# Altium PCB 2226051_이강민_ATmega128_PCB_2.PcbDoc
Units mil, origin at the board's own origin, x right, y up, seen from the top; angles counter-clockwise.
Board outline 1811.02 x 1811.02 mil, 2 copper layers (Top Layer, Bottom Layer); 31 components, 75 nets, 206 pads, 25 vias.
Unrouted connection lines stored in the file: 5.
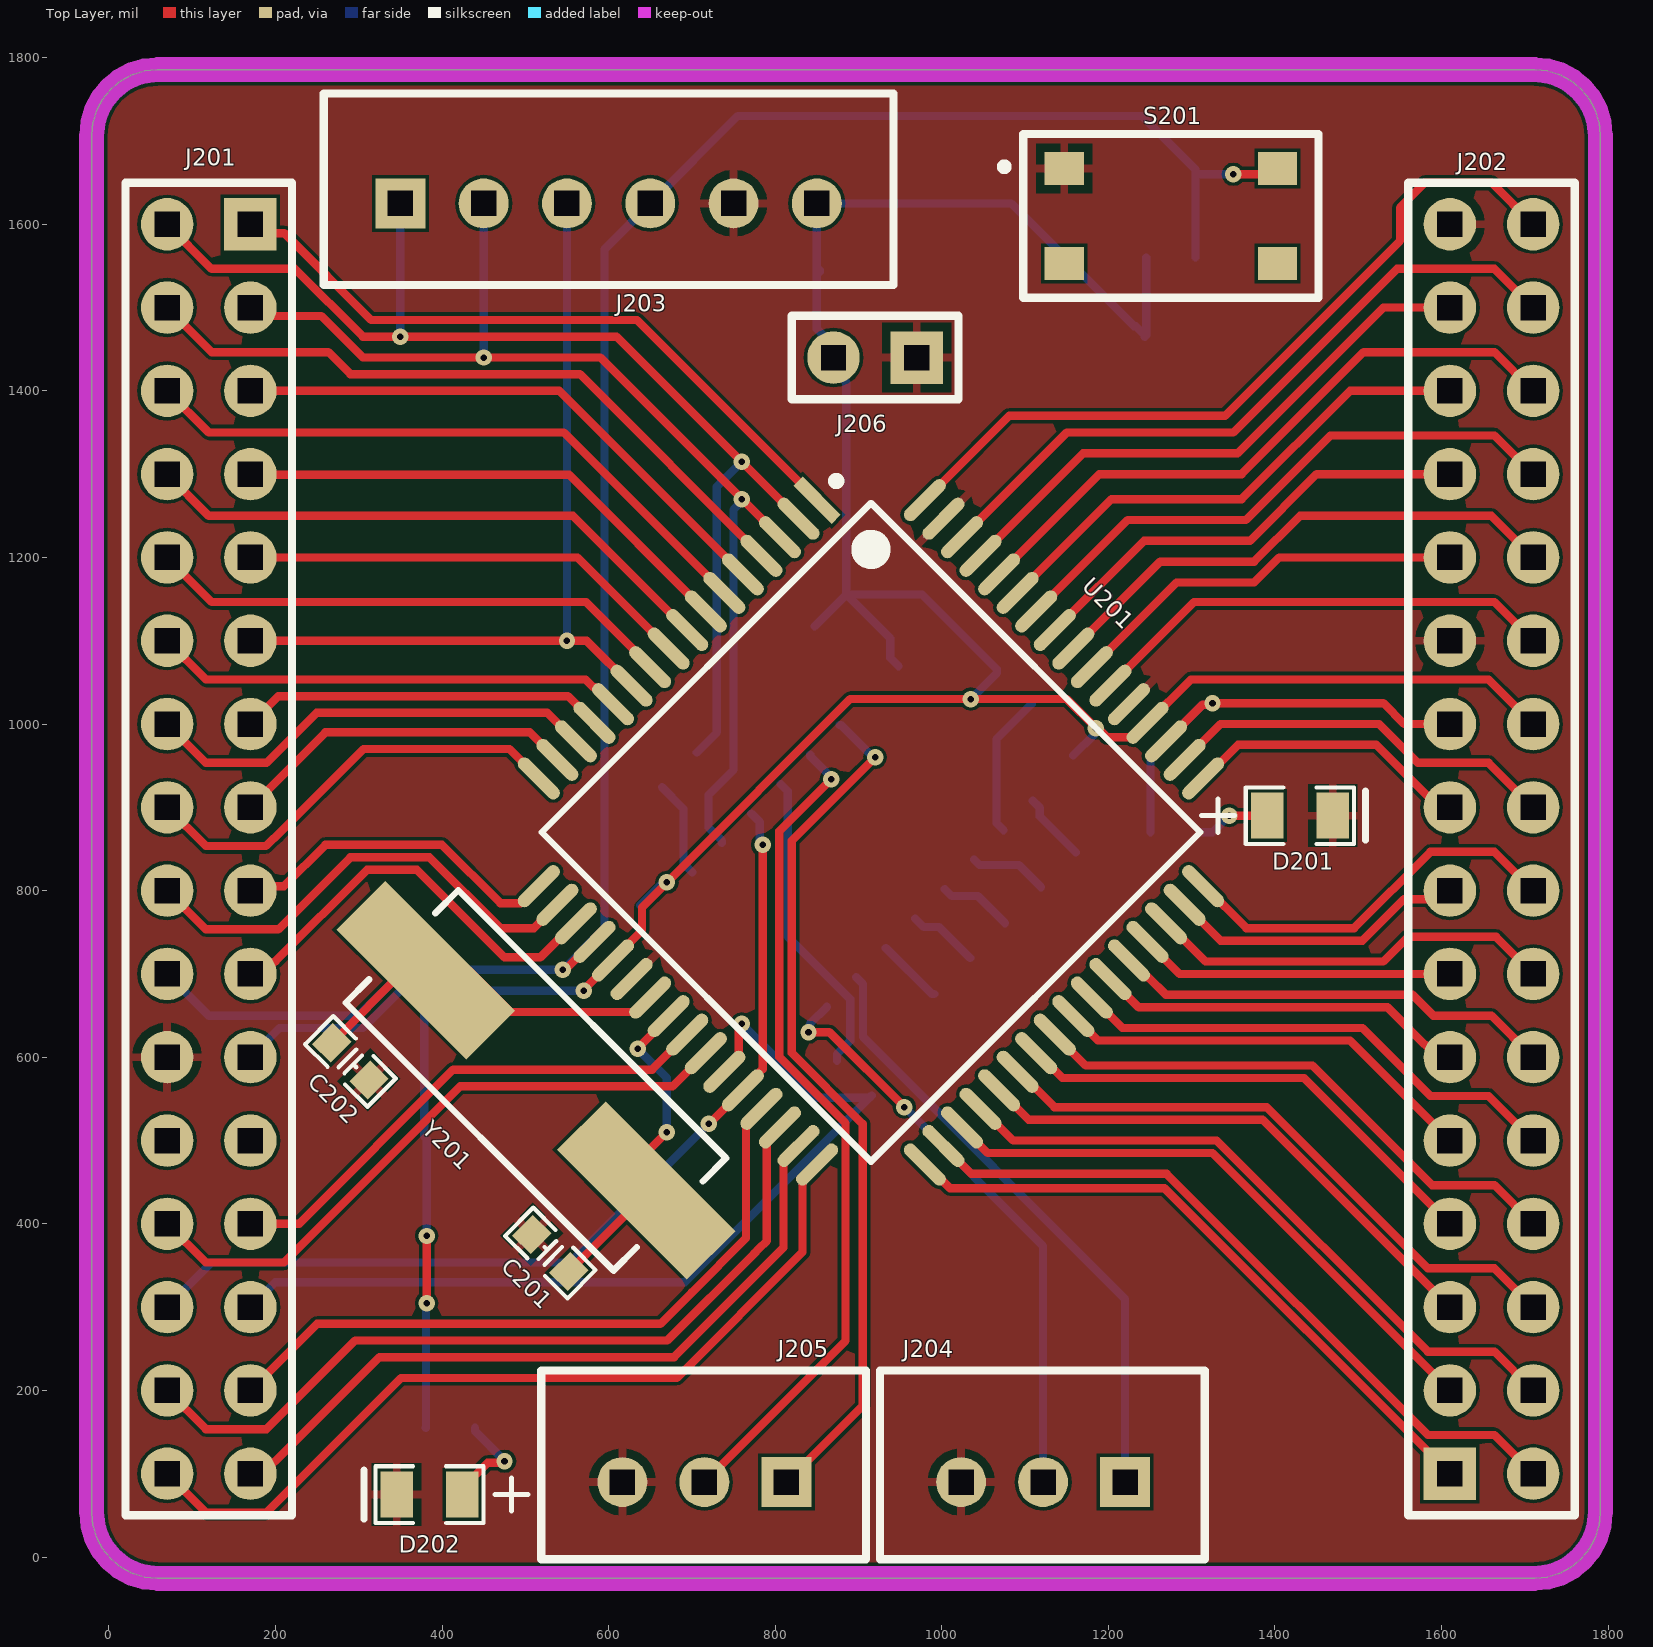
[diagram p0: Top Layer view]
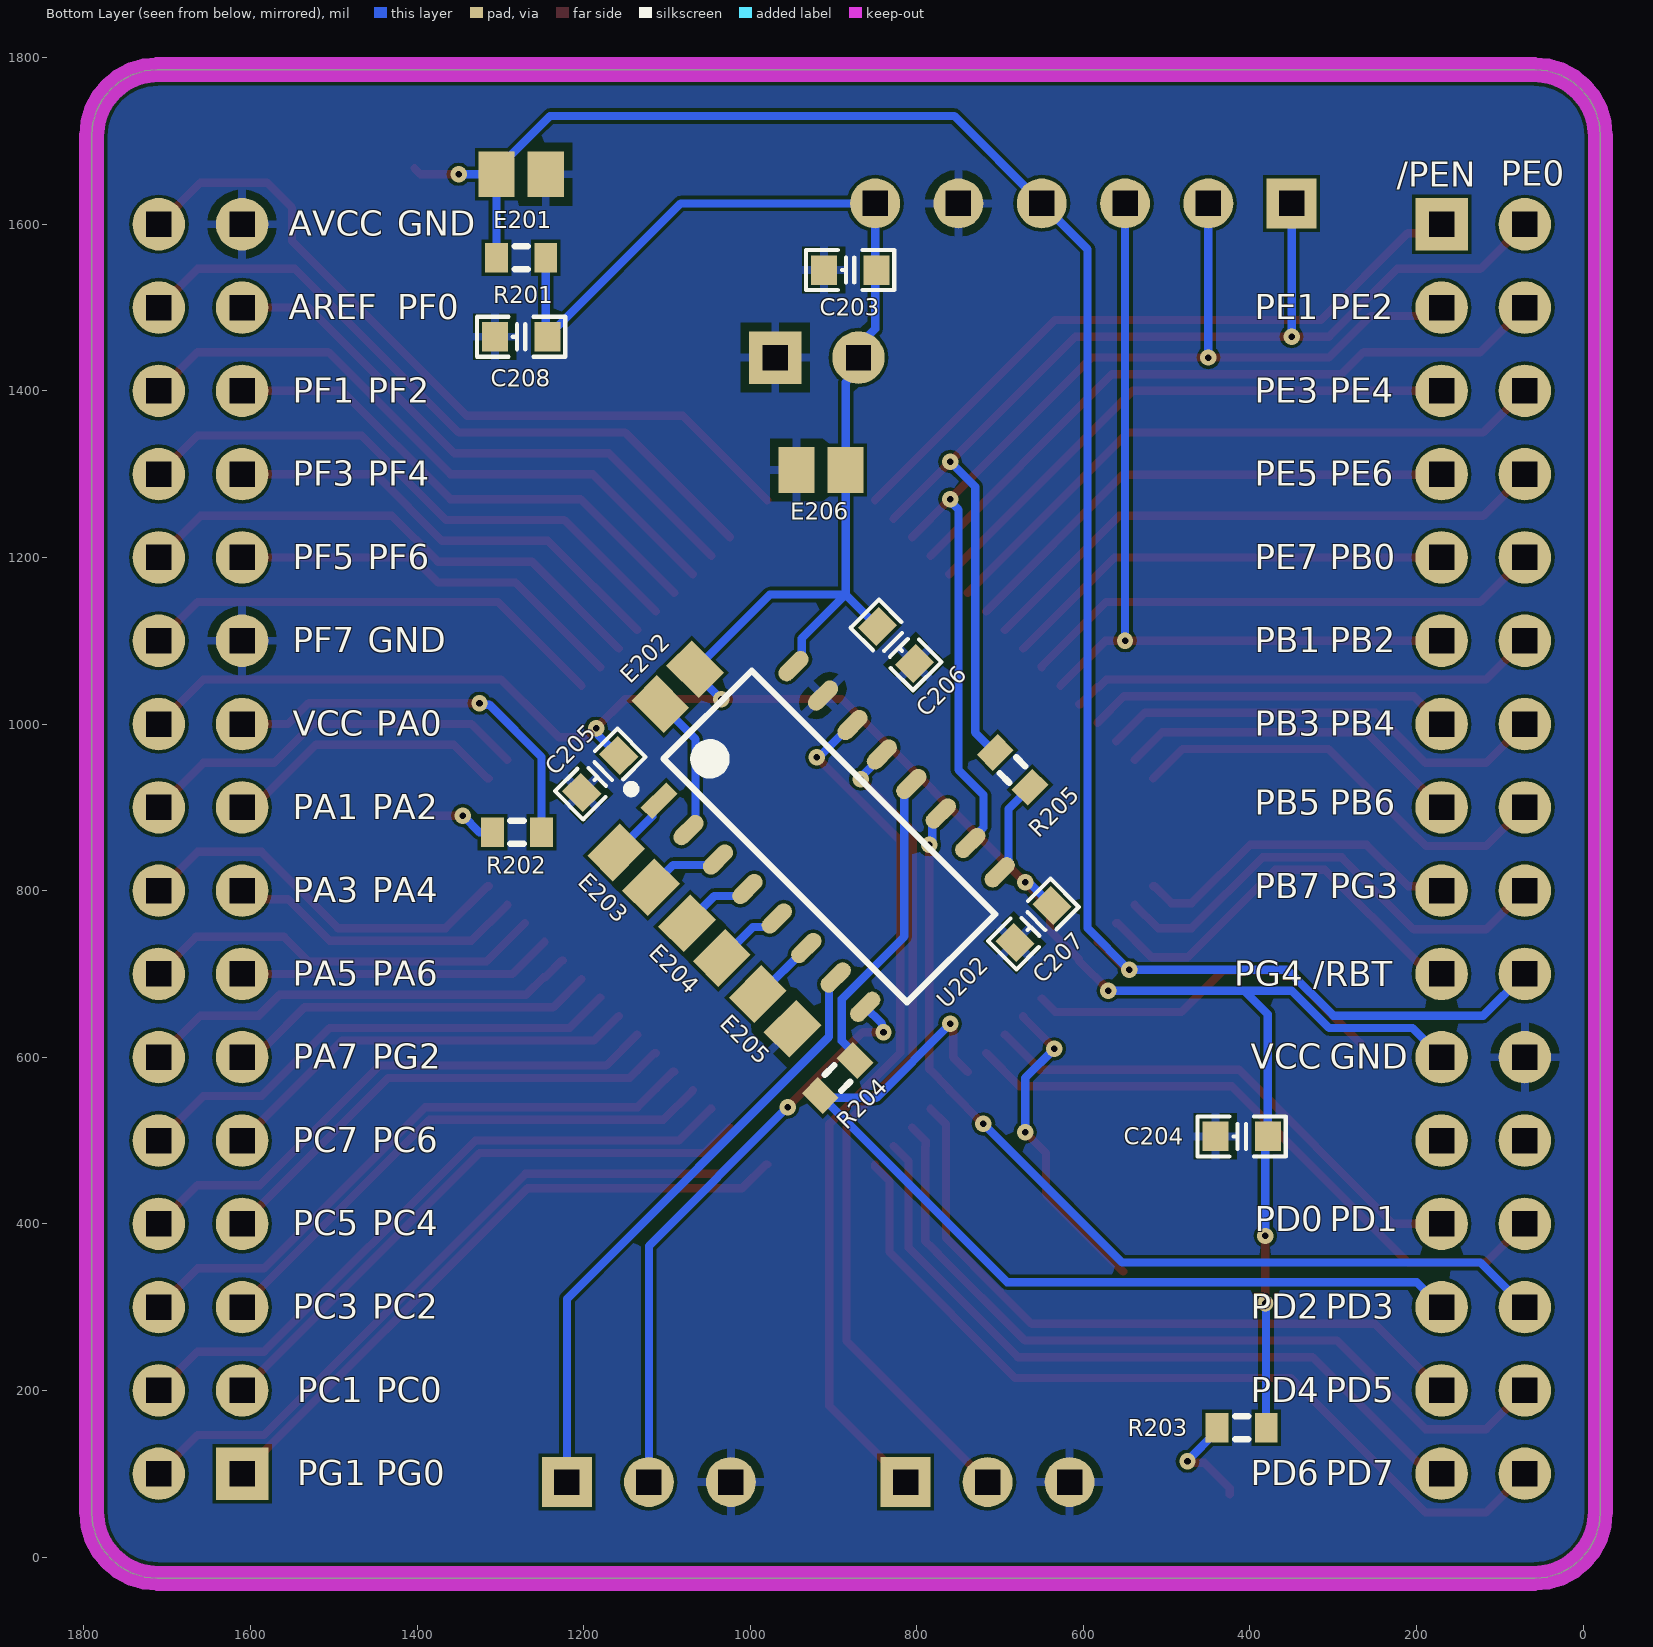
[diagram p1: Bottom Layer view, seen from below]
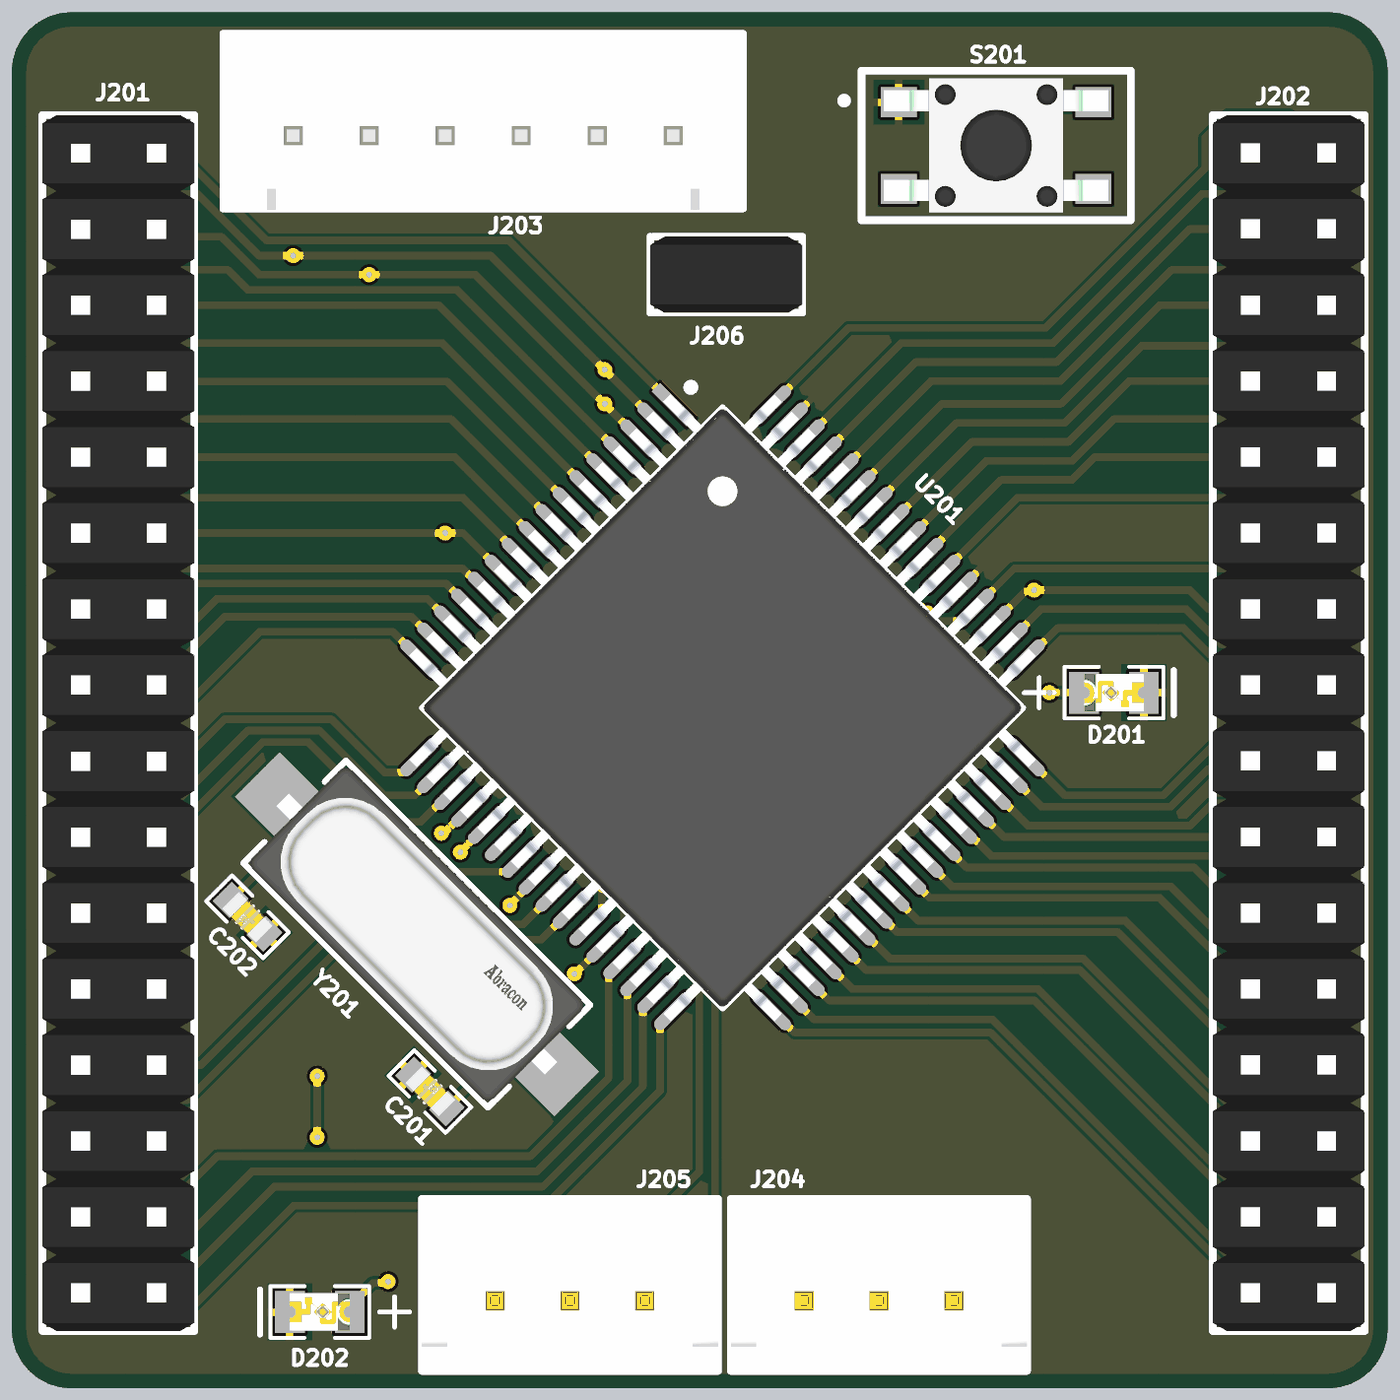
[diagram p2: 3D render of the assembled board from above, using the file's embedded part models]

## Layer stack, top to bottom
Top Solder: solder mask 0.4, Solder Resist, Dk 3.5
Top Layer: signal copper 1.4
Dielectric 1: dielectric 12.6, FR-4, Dk 4.8
Bottom Layer: signal copper 1.4
Bottom Solder: solder mask 0.4, Solder Resist, Dk 3.5

## Board outline
-20.51,53.23 -19,37.87 -14.52,23.1 -7.24,9.48 2.55,-2.45 14.48,-12.24 28.1,-19.52 42.87,-24 58.23,-25.51 1711.77,-25.51 1727.13,-24 1741.9,-19.52 1755.52,-12.24 1767.45,-2.45 1777.24,9.48 1784.52,23.1 1789,37.87 1790.51,53.23 1790.51,1706.77 1789,1722.13 1784.52,1736.9 1777.24,1750.52 1767.45,1762.45 1755.52,1772.24 1741.9,1779.52 1727.13,1784 1711.77,1785.51 58.23,1785.51 42.87,1784 28.1,1779.52 14.48,1772.24 2.55,1762.45 -7.24,1750.52 -14.52,1736.9 -19,1722.13 -20.51,1706.77

## Design rules (kind name [scope] priority, off if disabled: settings)
Clearance [All] p1: gap=3.9 ignorepadtopadclearanceinfootprint=FALSE
PolygonConnect [All] p1: connectstyle=Relief reliefconductorwidth=10 reliefentries=4 polygonreliefangle="90 Angle" airgapwidth=10
RoutingVias [All] p1: holewidth=7.87 width=19.68 viastyle="Through Hole" minholewidth=7.87 minwidth=19.68 maxholewidth=7.87 maxwidth=19.68
SilkToSilkClearance [All] p1: silktosilkclearance=3
SolderMaskExpansion [All] p1: expansion=4 istentingtop=FALSE
SupplyNets "Schematic Supply Nets_1" [InNet('VCC_Module')] p1: voltage=0.000
SupplyNets "Schematic Supply Nets" [InNet('GND')] p2: voltage=0.000
Width [All] p1: maxlimit=10 minlimit=10 preferedwidth=10
29 further rules are at their usual default settings.

## Components (designator, comment, footprint, x,y, rotation, side; value= is the part's Value field where it differs from the comment)
C201 "20pF" 0603C1608 530,365 r315 top
C202 "20pF" 0603C1608 290,595 r135 top
C203 "0.1uF" 0603C1608 880,1545 r180 bottom
C204 "0.1uF" 0603C1608 410,505 r180 bottom
C205 "0.1uF" 0603C1608 1180,940 r135 bottom
C206 "0.1uF" 0603C1608 825,1095 r45 bottom
C207 "0.1uF" 0603C1608 660,760 r135 bottom
C208 "0.1uF" 0603C1608 1275,1465 r180 bottom
D201 "LED_green" LED-2012 1430,890 r0 top
D202 "LED_red" LED-2012 385,75 r180 top
E201 "Cap Pol3" C0805 1275,1660 r180 bottom value=10uF
E202 "Cap Pol3" C0805 1087.07,1044.87 r135 bottom value=1uF
E203 "Cap Pol3" C0805 1140,825 r225 bottom value=1uF
E204 "Cap Pol3" C0805 1055,740 r225 bottom value=1uF
E205 "Cap Pol3" C0805 970,655 r45 bottom value=1uF
E206 "Cap Pol3" C0805 915,1305 r0 bottom value=10uF
J201 "CON32A" CON32A 120,850 r0 top
J202 "CON32A" CON32A 1660,850 r180 top
J203 "Pin Header 6P 2.54" ISP_connector 600,1625 r0 top
J204 "CON 3" RS-232_connector 1121.57,90 r180 top
J205 "CON 3" RS-232_connector 715,90 r180 top
J206 "Battery" battery_2pin 920,1440 r180 top
R201 "Res3" J1-0603 1275,1560 r180 bottom value=4.7K
R202 "Res3" J1-0603 1280,870 r180 bottom value=680
R203 "Res3" J1-0603 410,155 r180 bottom value=680
R204 "Res3" J1-0603 895,575 r135 bottom value=1K
R205 "Res3" J1-0603 685,945 r225 bottom value=1K
S201 "TACT_switch" IT-1109S 1275,1610 r0 top
U201 "ATmega128" ATmega128_1414 915,870 r315 top locked
U202 "MAX232A" MAX232A 905,865 r135 bottom
Y201 "XTAL 16MHz" X-TAL_SMD 512.77,572.23 r315 top

## Footprints (in the part's own frame and the unit in brackets; to place one, negate y for a bottom-side part, rotate by r counter-clockwise, add the part's x,y. Pads: shape width x height; smd on the part's side, far side on the other; paste and mask are expansions set on the pad)
0603C1608 [mm]
  rect 0.8x0.9 smd: 1(-0.8,0) 2(0.8,0)
  silkscreen extent -1.35,-0.61 1.35,0.61, body extent -0.8,-0.39 0.8,0.41, height 0.29
ATmega128_1414 [mm] "TQFP, 64-Leads, Body 14.00x14.00mm, Pitch 0.80mm, IPC Medium Density"
  rect 1.65x0.4 smd: 1(-8.325,6)
  oval 1.65x0.4 smd: 2(-8.325,5.2) 3(-8.325,4.4) 4(-8.325,3.6) 5(-8.325,2.8) 6(-8.325,2) 7(-8.325,1.2) 8(-8.325,0.4) 9(-8.325,-0.4) 10(-8.325,-1.2) 11(-8.325,-2) 12(-8.325,-2.8) 13(-8.325,-3.6) 14(-8.325,-4.4) 15(-8.325,-5.2) 16(-8.325,-6) 33(8.325,-6) 34(8.325,-5.2) 35(8.325,-4.4) 36(8.325,-3.6) 37(8.325,-2.8) 38(8.325,-2) 39(8.325,-1.2) 40(8.325,-0.4) 41(8.325,0.4) 42(8.325,1.2) 43(8.325,2) 44(8.325,2.8) 45(8.325,3.6) 46(8.325,4.4) 47(8.325,5.2) 48(8.325,6)
  oval 0.4x1.65 smd: 17(-6,-8.325) 18(-5.2,-8.325) 19(-4.4,-8.325) 20(-3.6,-8.325) 21(-2.8,-8.325) 22(-2,-8.325) 23(-1.2,-8.325) 24(-0.4,-8.325) 25(0.4,-8.325) 26(1.2,-8.325) 27(2,-8.325) 28(2.8,-8.325) 29(3.6,-8.325) 30(4.4,-8.325) 31(5.2,-8.325) 32(6,-8.325) 49(6,8.325) 50(5.2,8.325) 51(4.4,8.325) 52(3.6,8.325) 53(2.8,8.325) 54(2,8.325) 55(1.2,8.325) 56(0.4,8.325) 57(-0.4,8.325) 58(-1.2,8.325) 59(-2,8.325) 60(-2.8,8.325) 61(-3.6,8.325) 62(-4.4,8.325) 63(-5.2,8.325) 64(-6,8.325)
  silkscreen extent -8.45,-7.1 7.1,7.1, body extent -8.64,-8.64 8.64,8.64, height 2.85
battery_2pin [mm]
  rect 1.6x1.6 hole 0.762 square: 1(-1.27,0)
  round 1.6 hole 0.762 square: 2(1.27,0)
  silkscreen extent -2.54,-1.27 2.54,1.27, body extent -2.54,-1.27 2.54,1.27, height 8.4
C0805 [mm] "Chip Capacitor, Body 2.0x1.3mm, IPC High Density"
  rect 1.1x1.4 smd: 1(-0.75,0) 2(0.75,0)
  body extent -1.1,-0.72 1.1,0.72, height 1.4
CON32A [mm]
  rect 1.6x1.6 hole 0.762 square: 1(1.27,19.05)
  round 1.6 hole 0.762 square: 2(-1.27,19.05) 3(1.27,16.51) 4(-1.27,16.51) 5(1.27,13.97) 6(-1.27,13.97) 7(1.27,11.43) 8(-1.27,11.43) 9(1.27,8.89) 10(-1.27,8.89) 11(1.27,6.35) 12(-1.27,6.35) 13(1.27,3.81) 14(-1.27,3.81) 15(1.27,1.27) 16(-1.27,1.27) 17(1.27,-1.27) 18(-1.27,-1.27) 19(1.27,-3.81) 20(-1.27,-3.81) 21(1.27,-6.35) 22(-1.27,-6.35) 23(1.27,-8.89) 24(-1.27,-8.89) 25(1.27,-11.43) 26(-1.27,-11.43) 27(1.27,-13.97) 28(-1.27,-13.97) 29(1.27,-16.51) 30(-1.27,-16.51) 31(1.27,-19.05) 32(-1.27,-19.05)
  silkscreen extent -2.54,-20.32 2.54,20.32, body extent -2.54,-20.32 2.54,20.32, height 8.4
ISP_connector [mil]
  rect 60x60 hole 30 square: 1(-250,0)
  round 60 hole 30 square: 2(-150,0) 3(-50,0) 4(50,0) 5(150,0) 6(250,0)
  silkscreen extent -342,-98 342,132, body extent -342,-100 342,130, height 292
IT-1109S [mm]
  rect 1.2x1 smd: 1(-3.25,1.45) 2(3.25,1.45) 3(-3.25,-1.45) 4(3.25,-1.45)
  silkscreen extent -5.18,-2.5 4.5,2.5, body extent -3.75,-2.25 3.75,2.25, height 3.8
J1-0603 [mm] "Chip Resistor, Body 1.6x0.8mm, IPC High Density"
  rect 0.7x0.9 smd: 1(-0.75,0) 2(0.75,0)
  silkscreen extent -0.2,-0.35 0.2,0.35, body extent -0.85,-0.48 0.85,0.48, height 0.9
LED-2012 [mm]
  rect 1x1.4 smd: 1(-1,0) 2(1,0)
  silkscreen extent -3.01,-0.86 2,0.86, body extent -1,-0.63 1,0.62, height 0.64
MAX232A [mm] "SOIC, 16-Leads, Body 10.30x4.50mm, Pitch 1.27mm, IPC Medium Density"
  rect 1.1x0.5 smd: 1(-2.9,4.44)
  oval 1.1x0.5 smd: 2(-2.9,3.175) 3(-2.9,1.905) 4(-2.9,0.635) 5(-2.9,-0.635) 6(-2.9,-1.905) 7(-2.9,-3.175) 8(-2.9,-4.445) 9(2.9,-4.445) 10(2.9,-3.175) 11(2.9,-1.905) 12(2.9,-0.635) 13(2.9,0.635) 14(2.9,1.905) 15(2.9,3.175) 16(2.9,4.445)
  silkscreen extent -3.37,-5.25 1.9,5.42, body extent -3,-5.1 3,5.1, height 1.7
RS-232_connector [mil]
  rect 60x60 hole 30 square: 1(-98.43,0)
  round 60 hole 30 square: 2(0,0) 3(98.43,0)
  silkscreen extent -194,-134 196,93, body extent -194,-134 196,93, height 276
X-TAL_SMD [mm]
  rect 5.6x2.1 smd paste+0 mask+0: 1(-4.75,0) 2(4.75,0)
  silkscreen extent -5.78,-2.43 5.78,2.43, body extent -6.35,-2.35 6.35,2.35, height 4.3

## Part data
C201 C202 C203 C204 C205 C206 C207 C208: library part CAP-Chip, "SMDCapacitor"
D201 D202: library part LED
E201 E202 E203 E204 E205 E206: "Polarized Capacitor (Surface Mount)", LatestRevisionDate=29-May-2009, LatestRevisionNote="IPC-7351 Footprint Added.", PackageDescription="Chip Capacitor", PackageReference=C0805, Published=8-Jun-2000, Publisher="Altium Limited"
J203: library part "Header 6", "Header, 6-Pin", LatestRevisionDate=17-Jul-2002, LatestRevisionNote="Re-released for DXP Platform.", Publisher="Altium Limited"
J204 J205: library part "Header 3", "Header, 3-Pin", LatestRevisionDate=17-Jul-2002, LatestRevisionNote="Re-released for DXP Platform.", Publisher="Altium Limited"
J206: library part "Header 2", "Header, 2-Pin", LatestRevisionDate=17-Jul-2002, LatestRevisionNote="Re-released for DXP Platform.", Publisher="Altium Limited"
R201 R202 R203 R204 R205: "Resistor", LatestRevisionDate=29-May-2009, LatestRevisionNote="IPC-7351 Footprint Added.", PackageDescription="Chip Resistor", PackageReference=J1-0603, Published=8-Jun-2000, Publisher="Altium Limited"
Y201: library part CRYSTAL, "Crystal"

## Via types
v1: diameter 19.68, hole 7.87, Top Layer to Bottom Layer, 25 vias

## Nets (pads, with @x,y where several pads share a name; then routed paths per layer and width w, separated by ;. In a path a pad name is that pad's centre, name@x,y a point inside that pad or via, vN(x,y) a via of type N, cw(c..) or ccw(c..) an arc to the next point about the centre after c; other vN are vias at no path point)
GND: C201.1 C202.1 C203.1 C204.1 C205.1 C206.1 C207.1 C208.1 D201.2 D202.2 E201.2 E205.1 E206.2 J201.22 J202.21 J202.31 J203.5 J204.3 J205.3 J206.1 S201.1 U201.22 U201.53 U201.63 U202.15
Module_MISO: J201.3 J203.2 U201.3 U202.10 | length 1370.8
  Top Layer w10: J201.3 180.14,1489.86 255.14,1489.86 305,1440 v1(450,1440) 590,1440 v1(760,1270) U201.3@805.73,1224.25
  Bottom Layer w10: v1(450,1440) J203.2 ; U202.10 735.88,859.97 720,875.84 720,915 750,945 750,1257.38 760,1267.38 v1(760,1270)
Module_MOSI: J201.2 J203.1 R205.1 U201.2 | length 1436
  Top Layer w10: J201.2 123.5,1546.5 223.5,1546.5 305,1465 v1(350,1465) 609.52,1465 U201.2
  Bottom Layer w10: v1(350,1465) J203.1 ; R205.1 730,990 730,1285 v1(760,1315)
Module_PA0: J202.19 R202.2 U201.51 | length 561.8
  Top Layer w10: U201.51 1313.13,1023.15 1323.15,1023.15 v1(1325,1025) 1530,1025 1555,1000 J202.19
  Bottom Layer w10: R202.2 1250.47,960.47 1313.15,1023.15 1323.15,1023.15 v1(1325,1025)
Module_pin_1: J201.1 U201.1 | length 817.5
  Top Layer w10: J201.1 180.64,1589.36 210.64,1589.36 315,1485 634.07,1485 U201.1
Module_pin_4: J201.4 U201.4 | length 836.9
  Top Layer w10: J201.4 123.5,1446.5 263.5,1446.5 290,1420 565.44,1420 U201.4
Module_pin_5: J201.5 U201.5 | length 682.4
  Top Layer w10: J201.5 540.9,1400 U201.5
Module_pin_6: J201.6 U201.6 | length 769.4
  Top Layer w10: J201.6 120,1350 546.36,1350 U201.6
Module_pin_7: J201.7 U201.7 | length 614.9
  Top Layer w10: J201.7 170.68,1299.32 552.49,1299.32 U201.7
Module_pin_8: J201.8 U201.8 | length 701.9
  Top Layer w10: J201.8 120,1250 557.27,1250 U201.8
Module_pin_9: J201.9 U201.9 | length 547.4
  Top Layer w10: J201.9 562.73,1200 U201.9
Module_pin_10: J201.10 U201.10 | length 635.1
  Top Layer w10: J201.10 123.5,1146.5 572.99,1146.5 649.84,1069.65 U201.10
Module_pin_11: J201.11 J203.3 U201.11 | length 1004.9
  Top Layer w10: J201.11 v1(550,1100) 573.64,1100 U201.11
  Bottom Layer w10: v1(550,1100) J203.3
Module_pin_12: J201.12 U201.12 | length 566.9
  Top Layer w10: J201.12 116.5,1053.5 572.45,1053.5 581.87,1044.08 583.46,1044.08 603.74,1023.81 U201.12
Module_pin_13: J201.13 U201.13 | length 440.1
  Top Layer w10: J201.13 203.5,1033.5 551.06,1033.5 U201.13
Module_pin_14: J201.14 U201.14 | length 549
  Top Layer w10: J201.14 116.5,953.5 189.26,953.5 249.26,1013.5 526.51,1013.5 U201.14
Module_pin_15: J201.15 U201.15 | length 419.4
  Top Layer w10: J201.15 260,990 505.48,990 U201.15
Module_pin_16: J201.16 U201.16 | length 528.3
  Top Layer w10: J201.16 116.5,853.5 188.5,853.5 197.53,862.53 198.29,862.53 202.88,867.12 203.09,867.34 305.75,970 480.93,970 U201.16
Module_pin_17: J201.17 U201.17 | length 406.4
  Top Layer w10: J201.17 175.38,805.38 210.38,805.38 260,855 400,855 470,785 494.38,785 514.65,805.27 U201.17
Module_pin_18: J201.18 U201.18 | length 570.4
  Top Layer w10: J201.18 116.5,753.5 203.5,753.5 290,840 385,840 470,755 510.48,755 U201.18
Module_pin_19: J201.19 U201.19 | length 502.9
  Top Layer w10: J201.19 184.34,700 199.72,715.38 200.38,715.38 310,825 370,825 475,720 517.96,720 558.7,760.73 U201.19
Module_pin_20: E201.1 J201.20 J203.4 R201.1 S201.2 U201.20 | length 2465.7
  Top Layer w10: v1(545,705) 546.85,706.85 549.86,706.85 581.47,738.46 U201.20 ; v1(1350,1660) 1395.87,1660 S201.2
  Bottom Layer w10: J201.20 120,650 300,650 355,705 v1(545,705) 595,755 595,1570 J203.4 755,1730 1240.43,1730 1304.53,1665.91 E201.1 ; R201.1 E201.1 ; v1(1350,1660) E201.1
Module_pin_25: J201.25 U201.25 | length 618.4
  Top Layer w10: J201.25 228.43,400 413.43,585 652.27,585 U201.25
Module_pin_26: J201.26 U201.26 | length 770
  Top Layer w10: J201.26 116.5,353.5 210.22,353.5 421.72,565 676.81,565 U201.26
Module_pin_27: J201.27 R204.1 U201.27 | length 1111.1
  Top Layer w10: U201.27 756.32,599.96 756.32,633.7 760,637.38 v1(760,640)
  Bottom Layer w10: J201.27 200,330 691.76,330 R204.1 913.1,551.34 848.66,551.34 v1(760,640)
Module_pin_28: J201.28 U201.28 U202.11 | length 1146.8
  Top Layer w10: v1(720,520) 720.45,520 U201.28@760.97,560.52 ; U201.28 761.19,561.85 785,585.66 v1(785,855)
  Bottom Layer w10: J201.28 123.5,353.5 553.5,353.5 v1(720,520) ; U202.11 781.44,882.5 781.44,861.18 785,857.62 v1(785,855)
Module_pin_29: J201.29 U201.29 | length 833.5
  Top Layer w10: J201.29 250,280 662.11,280 699.93,317.82 765,382.89 765,519.56 U201.29
Module_pin_30: J201.30 U201.30 | length 976
  Top Layer w10: J201.30 116.5,153.5 189.26,153.5 280,244.24 295.75,260 670.39,260 775,364.61 780,369.61 790,379.61 790,492.62 789.43,493.19 789.43,499.45 U201.30
Module_pin_31: J201.31 U201.31 | length 882
  Top Layer w10: J201.31 184.34,100 199.72,115.38 200.38,115.38 325,240 678.68,240 810,371.32 810,475.48 U201.31
Module_pin_32: J201.32 U201.32 | length 1024
  Top Layer w10: J201.32 116.5,53.5 189.26,53.5 350.76,215 681.96,215 832.87,365.91 832.87,451.15 850.27,468.55 U201.32
Module_pin_33: J202.1 U201.33 | length 784
  Top Layer w10: U201.33 981.28,471.21 1009.77,442.72 1267.28,442.72 J202.1
Module_pin_34: J202.2 U201.34 | length 871
  Top Layer w10: U201.34 1035.48,460 1270,460 1583.5,146.5 1663.5,146.5 J202.2
Module_pin_35: J202.3 U201.35 | length 716.5
  Top Layer w10: U201.35 1055.02,485 1325,485 J202.3
Module_pin_36: J202.4 U201.36 | length 803.5
  Top Layer w10: U201.36 1047.64,538.02 1085.66,500 1330,500 1583.5,246.5 1663.5,246.5 J202.4
Module_pin_37: J202.5 U201.37 | length 649
  Top Layer w10: U201.37 1104.1,525 1385,525 J202.5
Module_pin_38: J202.6 U201.38 | length 736
  Top Layer w10: U201.38 1092.64,582.56 1112.91,562.29 1135.2,540 1390,540 1583.5,346.5 1663.5,346.5 J202.6
Module_pin_39: J202.7 U201.39 | length 581.5
  Top Layer w10: U201.39 1114.91,604.84 1135.18,584.56 1144.74,575 1435,575 J202.7
Module_pin_40: J202.8 U201.40 | length 668.4
  Top Layer w10: U201.40 1172.73,590 1445,590 1588.5,446.5 1663.5,446.5 J202.8
Module_pin_41: J202.9 U201.41 | length 514
  Top Layer w10: U201.41 1187.27,620 1490,620 J202.9
Module_pin_42: J202.10 U201.42 | length 600.9
  Top Layer w10: U201.42 1216.81,635 1505,635 1586.5,553.5 1656.5,553.5 J202.10
Module_pin_43: J202.11 U201.43 | length 446.5
  Top Layer w10: U201.43 1236.36,660 1535,660 1579.62,615.38 1580.28,615.38 1595.66,600 J202.11
Module_pin_44: J202.12 U201.44 | length 533.4
  Top Layer w10: U201.44 1226.26,716.19 1246.54,695.92 1248.14,695.92 1269.05,675 1565,675 1590,650 1660,650 J202.12
Module_pin_45: J202.13 U201.45 | length 379
  Top Layer w10: U201.45 1285.44,700 J202.13
Module_pin_46: J202.14 U201.46 | length 488.8
  Top Layer w10: U201.46@1270.81,760.73 1316.54,715 1530,715 1559.47,744.47 1665.53,744.47 J202.14
Module_pin_47: J202.15 U201.47 | length 361.1
  Top Layer w10: U201.47 1334.52,740 1505,740 1554.86,789.86 1599.86,789.86 J202.15
Module_pin_48: J202.16 U201.48 | length 474.2
  Top Layer w10: U201.48 1315.35,805.27 1365.62,755 1495,755 1586.5,846.5 1663.5,846.5 J202.16
Module_pin_49: J202.17 U201.49 | length 344
  Top Layer w10: U201.49 1315.35,934.73 1355.62,975 1521.72,975 1596.72,900 J202.17
Module_pin_50: J202.18 U201.50 | length 477.7
  Top Layer w10: U201.50 1334.52,1000 1525,1000 1571.5,953.5 1656.5,953.5 J202.18
Module_pin_54: J202.22 U201.54 | length 568.4
  Top Layer w10: U201.54 1302.85,1146.5 1663.5,1146.5 J202.22
Module_pin_55: J202.23 U201.55 | length 484.4
  Top Layer w10: U201.55 1281.81,1170 1375,1170 1405,1200 J202.23
Module_pin_56: J202.24 U201.56 | length 638.8
  Top Layer w10: U201.56 1262.27,1195 1375,1195 1430,1250 1660,1250 J202.24
Module_pin_57: J202.25 U201.57 | length 551.9
  Top Layer w10: U201.57 1242.73,1220 1370,1220 1450,1300 J202.25
Module_pin_58: J202.26 U201.58 | length 703.4
  Top Layer w10: U201.58 1223.19,1245 1365,1245 1466.5,1346.5 1663.5,1346.5 J202.26
Module_pin_59: J202.27 U201.59 | length 619.4
  Top Layer w10: U201.59 1203.64,1270 1360,1270 1490,1400 J202.27
Module_pin_60: J202.28 U201.60 | length 771
  Top Layer w10: U201.60 1189.1,1300 1360,1300 1506.5,1446.5 1623.5,1446.5 1663.5,1446.5 J202.28
Module_pin_61: J202.29 U201.61 | length 686.9
  Top Layer w10: U201.61 1169.56,1325 1355,1325 1530,1500 J202.29
Module_pin_62: J202.30 U201.62 | length 838.5
  Top Layer w10: U201.62 1150.02,1350 1350,1350 1546.5,1546.5 1663.5,1546.5 J202.30
Module_pin_64: J202.32 U201.64 | length 932.3
  Top Layer w10: U201.64 1080.93,1370 1340,1370 1550,1580 1550,1620 1580,1650 1660,1650 J202.32
Module_RS_RXD0: J204.2 U202.8 | length 710.9
  Top Layer w10: v1(840,630) 865,630 v1(955,540)
  Bottom Layer w10: v1(840,630) 841.85,631.85 841.85,640.39 U202.8 ; v1(955,540) 1121.57,373.43 J204.2
Module_RS_RXD1: J205.2 U202.13 | length 1012.9
  Top Layer w10: J205.2 884.45,259.45 884.45,520.9 805,600.34 805,871.51 v1(867.38,933.89)
  Bottom Layer w10: U202.13 841.94,961.37 867.38,935.93 v1(867.38,933.89)
Module_RS_TXD0: J204.1 U202.7 | length 739.5
  Bottom Layer w10: U202.7 905.42,687.8 905.42,624.58 1220,310 J204.1
Module_RS_TXD1: J205.1 U202.14 | length 1043.3
  Top Layer w10: J205.1 905,181.57 905,520 820,605 820,860 v1(920,960)
  Bottom Layer w10: U202.14 879.27,998.77 918.03,960 v1(920,960)
NetC201_2: C201.2 U201.24 Y201.2 | length 385.1
  Top Layer w10: C201.2 645,435.46 Y201.2 645,485 v1(670,510) ; v1@634.64,610.36 672.11,647.82 U201.24
  Bottom Layer w10: v1(635,610) 670,575 v1(670,510)
NetC202_2: C202.2 U201.23 Y201.1 | length 445.7
  Top Layer w10: C202.2 354.93,704.47 Y201.1 431.92,704.47 482.14,654.25 633.62,654.25 U201.23@649.84,670.47
NetD201_1: D201.1 R202.1 | length 89.4
  Top Layer w10: v1(1345,890) D201.1
  Bottom Layer w10: R202.1 1325,870 v1(1345,890)
NetD202_1: D202.1 R203.1 | length 126.5
  Top Layer w10: D202.1 424.37,82.87 454.64,113.15 473.15,113.15 v1(475,115)
  Bottom Layer w10: R203.1 439.53,151.06 475,115.59 v1(475,115)
NetE202_1: E202.1 U202.2 | length 172.3
  Bottom Layer w10: U202.2 1065.77,881.01 1065.77,981.81 E202.1
NetE203_1: E203.1 U202.1 | length 83.3
  Bottom Layer w10: U202.1 1117.69,899.52 1117.69,889.07 E203.1
NetE203_2: E203.2 U202.3 | length 94.1
  Bottom Layer w10: U202.3 1045.26,830.8 1092.44,830.8 E203.2
NetE204_1: E204.1 U202.4 | length 89.5
  Bottom Layer w10: U202.4 1011.76,793.59 1043.17,793.59 E204.1
NetE204_2: E204.2 U202.5 | length 85.7
  Bottom Layer w10: U202.5 978.26,756.38 996.86,756.38 E204.2
NetE205_2: E205.2 U202.6 | length 81.1
  Bottom Layer w10: U202.6 988.05,675.88 E205.2
NetR204_2: R204.2 U202.12 | length 373.3
  Bottom Layer w10: U202.12 814.94,919.7 814.94,745.06 890,670 890,619.54 874.12,603.66 R204.2
NetR205_2: R205.2 U202.9 | length 117.2
  Bottom Layer w10: R205.2 690,898.24 690,839.36 690.32,839.04 690.32,832.19 U202.9
VCC_Module: C203.2 C204.2 C205.2 C206.2 C207.2 C208.2 E202.2 E206.1 J201.21 J202.20 J203.6 J206.2 R201.2 R203.2 U201.21 U201.52 U202.16 | length 3907.4
  Top Layer w10: v1(381.64,304.84) v1(381.64,385.45) ; v1(570,680) 570,680.45 605.29,715.74 605.29,717.61 640,752.32 640,780 v1(670,810) 890,1030 1150,1030 v1(1185,995) 1187.62,995 1198.48,984.14 1229.58,984.14 U201.52 1298.94,1053.5 1656.5,1053.5 J202.20
  Bottom Layer w10: J201.21 205,635 305,635 350,680 407.01,680 ; R203.2 380.82,155.35 380.82,304.02 v1(381.64,304.84) ; v1(381.64,385.45) 381.64,501.87 C204.2 378.5,651.5 407.01,680 ; v1(570,680) 407.01,680 ; C207.2 663.61,808.15 668.15,808.15 v1(670,810) ; C206.2 885.47,1155.47 ; C203.2@853.5,1543.03 C203.2@853.5,1545 ; U202.16 938.27,1079.21 938.27,1102.67 885.47,1155.47 ; v1(1035,1030) 1066.19,1061.19 E202.2 976.48,1155.47 885.47,1155.47 ; C205.2 1183.15,987.69 1183.15,993.15 v1(1185,995) ; R201.2 1245.47,1466.97 C208.2 1243.5,1466.97 1232.76,1477.72 1230.79,1477.72 1083.5,1625 J203.6 850,1474.34 870,1454.34 J206.2 870,1425.66 885.47,1410.19 E206.1 885.47,1155.47
pads on no net: J201.23 J201.24 S201.3 S201.4

## Polygon pours and split planes (outlines as drawn)
GND on Bottom Layer "GND_L02_P001" (solid, remove dead copper, pour order 1): -20.51,53.23 -19,37.87 -14.52,23.1 -7.24,9.48 2.55,-2.45 14.48,-12.24 28.1,-19.52 42.87,-24 58.23,-25.51 1711.77,-25.51 1727.13,-24 1741.9,-19.52 1755.52,-12.24 1767.45,-2.45 1777.24,9.48 1784.52,23.1 1789,37.87 1790.51,53.23 1790.51,1706.77 1789,1722.13 1784.52,1736.9 1777.24,1750.52 1767.45,1762.45 1755.52,1772.24 1741.9,1779.52 1727.13,1784 1711.77,1785.51 58.23,1785.51 42.87,1784 28.1,1779.52 14.48,1772.24 2.55,1762.45 -7.24,1750.52 -14.52,1736.9 -19,1722.13 -20.51,1706.77
GND on Top Layer "GND_L01_P000" (solid, remove dead copper, pour order 0): -20.51,53.23 -19,37.87 -14.52,23.1 -7.24,9.48 2.55,-2.45 14.48,-12.24 28.1,-19.52 42.87,-24 58.23,-25.51 1711.77,-25.51 1727.13,-24 1741.9,-19.52 1755.52,-12.24 1767.45,-2.45 1777.24,9.48 1784.52,23.1 1789,37.87 1790.51,53.23 1790.51,1706.77 1789,1722.13 1784.52,1736.9 1777.24,1750.52 1767.45,1762.45 1755.52,1772.24 1741.9,1779.52 1727.13,1784 1711.77,1785.51 58.23,1785.51 42.87,1784 28.1,1779.52 14.48,1772.24 2.55,1762.45 -7.24,1750.52 -14.52,1736.9 -19,1722.13 -20.51,1706.77

## Keep-outs
Keep-Out Layer:
  lines w15: -27.98,52.49 cw(c-20.51,53.23) -28.01,53.23 ; -27.98,52.49 cw(c-20.51,53.23) -28.01,53.23 ; -27.98,52.49 -26.46,37.13 ; -28.01,53.23 -28.01,1706.77 ; -28.01,1706.77 cw(c-20.51,1706.77) -27.98,1707.51 ; -28.01,1706.77 cw(c-20.51,1706.77) -27.98,1707.51 ; -27.98,1707.51 -26.46,1722.87 ; -26.46,37.13 ccw(c-19,37.87) -26.17,35.67 ; -26.46,37.13 ccw(c-19,37.87) -26.18,35.69 -26.17,35.67 ; -26.46,1722.87 cw(c-19,1722.13) -26.17,1724.33 ; -26.46,1722.87 cw(c-19,1722.13) -26.18,1724.31 -26.17,1724.33 ; -26.17,35.67 -21.7,20.93 ; -26.17,1724.33 -21.7,1739.07 ; -21.7,20.93 ccw(c-14.52,23.1) -21.13,19.56 ; -21.7,20.93 -21.7,20.92 ccw(c-14.52,23.1) -21.13,19.55 ; -21.7,1739.07 cw(c-14.52,1736.9) -21.13,1740.44 ; -21.7,1739.07 -21.7,1739.08 cw(c-14.52,1736.9) -21.13,1740.45 ; -21.13,19.56 -21.13,19.55 ; -21.13,19.55 -13.86,5.96 ; -21.13,1740.45 -13.86,1754.04 ; -21.13,1740.44 -21.13,1740.45 ; -13.86,5.96 ccw(c-7.24,9.48) -13.04,4.72 ; -13.86,5.95 ccw(c-7.24,9.48) -13.03,4.71 ; -13.86,5.96 -13.86,5.95 ; -13.86,1754.05 cw(c-7.24,1750.52) -13.03,1755.29 ; -13.86,1754.04 cw(c-7.24,1750.52) -13.04,1755.28 ; -13.86,1754.04 -13.86,1754.05 ; -13.04,4.72 -13.03,4.71 ; -13.03,4.71 -3.26,-7.2 ; -13.03,1755.29 -3.26,1767.2 ; -13.04,1755.28 -13.03,1755.29 ; -3.25,-7.21 ccw(c2.55,-2.45) -2.2,-8.26 ; -3.26,-7.2 ccw(c2.55,-2.45) -2.21,-8.25 ; -3.26,-7.2 -3.25,-7.21 ; -3.25,1767.21 cw(c2.55,1762.45) -2.19,1768.26 ; -3.26,1767.2 cw(c2.55,1762.45) -2.21,1768.25 ; -3.26,1767.2 -3.25,1767.21 ; -2.2,-8.26 9.71,-18.03 ; -2.21,-8.25 -2.2,-8.26 ; -2.19,1768.26 9.71,1778.03 ; -2.21,1768.25 -2.19,1768.26 ; 9.72,-18.04 ccw(c14.48,-12.24) 10.96,-18.86 ; 9.71,-18.03 ccw(c14.48,-12.24) 10.95,-18.86 ; 9.71,-18.03 9.72,-18.04 ; 9.72,1778.04 cw(c14.48,1772.24) 10.95,1778.86 ; 9.71,1778.03 cw(c14.48,1772.24) 10.95,1778.86 ; 9.71,1778.03 9.72,1778.04 ; 10.96,-18.86 24.55,-26.13 ; 10.95,-18.86 10.96,-18.86 ; 10.95,1778.86 24.56,1786.13 ; 24.55,-26.13 ccw(c28.1,-19.52) 25.92,-26.7 25.93,-26.7 ; 24.56,-26.13 ccw(c28.1,-19.52) 25.93,-26.7 ; 24.55,-26.13 24.56,-26.13 ; 24.56,1786.13 cw(c28.1,1779.52) 25.93,1786.7 ; 24.56,1786.13 cw(c28.1,1779.52) 25.92,1786.7 25.93,1786.7 ; 25.93,-26.7 40.67,-31.17 ; 25.93,1786.7 40.67,1791.17 ; 40.67,-31.17 ccw(c42.87,-24) 42.13,-31.46 ; 40.67,-31.17 40.69,-31.18 ccw(c42.87,-24) 42.13,-31.46 ; 40.67,1791.17 cw(c42.87,1784) 42.13,1791.46 ; 40.67,1791.17 40.69,1791.18 cw(c42.87,1784) 42.13,1791.46 ; 42.13,-31.46 57.49,-32.98 ; 42.13,1791.46 57.49,1792.98 ; 57.49,-32.98 ccw(c58.23,-25.51) 58.23,-33.01 ; 57.49,-32.98 ccw(c58.23,-25.51) 58.23,-33.01 ; 57.49,1792.98 cw(c58.23,1785.51) 58.23,1793.01 ; 57.49,1792.98 cw(c58.23,1785.51) 58.23,1793.01 ; 58.23,-33.01 1711.77,-33.01 ; 58.23,1793.01 1711.77,1793.01 ; 1711.77,-33.01 ccw(c1711.77,-25.51) 1712.51,-32.98 ; 1711.77,-33.01 ccw(c1711.77,-25.51) 1712.51,-32.98 ; 1711.77,1793.01 cw(c1711.77,1785.51) 1712.54,1792.97 ; 1711.77,1793.01 cw(c1711.77,1785.51) 1712.51,1792.98 1712.54,1792.97 ; 1712.51,-32.98 1727.87,-31.46 ; 1712.54,1792.97 1727.84,1791.47 ; 1727.87,-31.46 ccw(c1727.13,-24) 1729.33,-31.17 ; 1727.87,-31.46 ccw(c1727.13,-24) 1729.31,-31.18 1729.33,-31.17 ; 1727.87,1791.46 cw(c1727.13,1784) 1729.33,1791.17 ; 1727.84,1791.47 cw(c1727.13,1784) 1729.31,1791.18 1729.33,1791.17 ; 1727.84,1791.47 1727.87,1791.46 ; 1729.33,-31.17 1744.07,-26.7 ; 1729.33,1791.17 1744.07,1786.7 ; 1744.07,-26.7 ccw(c1741.9,-19.52) 1745.44,-26.13 ; 1744.07,-26.7 1744.08,-26.7 ccw(c1741.9,-19.52) 1745.45,-26.13 ; 1744.07,1786.7 cw(c1741.9,1779.52) 1745.44,1786.13 ; 1744.07,1786.7 1744.08,1786.7 cw(c1741.9,1779.52) 1745.44,1786.13 ; 1745.45,-26.13 1759.04,-18.86 ; 1745.44,-26.13 1745.45,-26.13 ; 1745.44,1786.13 1759.05,1778.86 ; 1759.05,-18.86 ccw(c1755.52,-12.24) 1760.29,-18.03 ; 1759.04,-18.86 ccw(c1755.52,-12.24) 1760.28,-18.04 ; 1759.04,-18.86 1759.05,-18.86 ; 1759.05,1778.86 cw(c1755.52,1772.24) 1760.29,1778.03 ; 1759.05,1778.86 cw(c1755.52,1772.24) 1760.28,1778.04 ; 1760.29,-18.03 1772.2,-8.26 ; 1760.28,-18.04 1760.29,-18.03 ; 1760.29,1778.03 1772.19,1768.26 ; 1760.28,1778.04 1760.29,1778.03 ; 1772.21,-8.25 ccw(c1767.45,-2.45) 1773.26,-7.19 ; 1772.2,-8.26 ccw(c1767.45,-2.45) 1773.25,-7.21 ; 1772.2,-8.26 1772.21,-8.25 ; 1772.21,1768.25 cw(c1767.45,1762.45) 1773.26,1767.19 ; 1772.19,1768.26 cw(c1767.45,1762.45) 1773.25,1767.21 ; 1772.19,1768.26 1772.21,1768.25 ; 1773.26,-7.19 1783.03,4.71 ; 1773.25,-7.21 1773.26,-7.19 ; 1773.25,1767.21 1773.26,1767.19 ; 1773.26,1767.19 1783.03,1755.29 ; 1783.04,4.72 ccw(c1777.24,9.48) 1783.86,5.95 ; 1783.03,4.71 ccw(c1777.24,9.48) 1783.86,5.95 ; 1783.03,4.71 1783.04,4.72 ; 1783.04,1755.28 cw(c1777.24,1750.52) 1783.86,1754.05 ; 1783.03,1755.29 cw(c1777.24,1750.52) 1783.86,1754.05 ; 1783.03,1755.29 1783.04,1755.28 ; 1783.86,5.95 1791.13,19.56 ; 1783.86,1754.05 1791.13,1740.44 ; 1791.13,19.56 ccw(c1784.52,23.1) 1791.7,20.93 ; 1791.13,19.56 ccw(c1784.52,23.1) 1791.7,20.92 1791.7,20.93 ; 1791.13,1740.44 cw(c1784.52,1736.9) 1791.7,1739.07 ; 1791.13,1740.44 cw(c1784.52,1736.9) 1791.7,1739.08 1791.7,1739.07 ; 1791.7,20.93 1796.17,35.67 ; 1791.7,1739.07 1796.17,1724.33 ; 1796.17,35.67 ccw(c1789,37.87) 1796.46,37.13 ; 1796.17,35.67 1796.18,35.69 ccw(c1789,37.87) 1796.46,37.13 ; 1796.17,1724.33 cw(c1789,1722.13) 1796.46,1722.87 ; 1796.17,1724.33 1796.18,1724.31 cw(c1789,1722.13) 1796.47,1722.84 ; 1796.46,37.13 1797.98,52.49 ; 1796.46,1722.87 1796.47,1722.84 ; 1796.47,1722.84 1797.97,1707.54 ; 1797.97,1707.54 cw(c1790.51,1706.77) 1798.01,1706.77 ; 1797.97,1707.54 1797.98,1707.51 cw(c1790.51,1706.77) 1798.01,1706.77 ; 1797.98,52.49 ccw(c1790.51,53.23) 1798.01,53.23 ; 1797.98,52.49 ccw(c1790.51,53.23) 1798.01,53.23 ; 1798.01,53.23 1798.01,1706.77 ; -13.01,53.6 -13.01,1706.4 -11.61,1720.66 -7.55,1734.02 -0.97,1746.33 7.88,1757.12 18.67,1765.97 30.98,1772.55 44.34,1776.61 58.6,1778.01 1711.4,1778.01 1725.66,1776.61 1739.02,1772.55 1751.33,1765.97 1762.12,1757.12 1770.97,1746.33 1777.55,1734.02 1781.61,1720.66 1783.01,1706.4 1783.01,53.6 1781.61,39.34 1777.55,25.98 1770.97,13.67 1762.12,2.88 1751.33,-5.97 1739.02,-12.55 1725.66,-16.61 1711.4,-18.01 58.6,-18.01 44.34,-16.61 30.98,-12.55 18.67,-5.97 7.88,2.88 -0.97,13.67 -7.55,25.98 -11.61,39.34 -13.01,53.6

## Silkscreen, mask and mechanical layers (free items; w line width, h text height)
Bottom Overlay:
  text "PE0" at 99,1646 h30
  text "/PEN" at 224,1645.28 h30
  text "GND" at 1424,1586 h30
  text "AVCC" at 1554,1586 h30
  text "PE2" at 304,1486 h30
  text "PE1" at 394,1486 h30
  text "PF0" at 1424,1486 h30
  text "AREF" at 1554,1486 h30
  text "PE4" at 304,1386 h30
  text "PE3" at 394,1386 h30
  text "PF2" at 1459,1386 h30
  text "PF1" at 1549,1386 h30
  text "PE6" at 304,1286 h30
  text "PE5" at 394,1286 h30
  text "PF4" at 1459,1286 h30
  text "PF3" at 1549,1286 h30
  text "PB0" at 304,1186 h30
  text "PE7" at 394,1186 h30
  text "PF6" at 1459,1186 h30
  text "PF5" at 1549,1186 h30
  text "PB2" at 304,1086 h30
  text "PB1" at 394,1086 h30
  text "GND" at 1459,1086 h30
  text "PF7" at 1549,1086 h30
  text "PB4" at 304,986 h30
  text "PB3" at 394,986 h30
  text "PA0" at 1449,986 h30
  text "VCC" at 1549,986 h30
  text "PB6" at 304,891 h30
  text "PB5" at 394,891 h30
  text "PA2" at 1454,886 h30
  text "PA1" at 1549,886 h30
  text "PG3" at 304,791 h30
  text "PB7" at 394,791 h30
  text "PA4" at 1454,786 h30
  text "PA3" at 1549,786 h30
  text "PG4" at 419,686 h30
  text "PA6" at 1454,686 h30
  text "PA5" at 1549,686 h30
  text "/RBT" at 324,685.28 h30
  text "GND" at 304,586 h30
  text "VCC" at 399,586 h30
  text "PG2" at 1454,586 h30
  text "PA7" at 1549,586 h30
  text "PC6" at 1454,486 h30
  text "PC7" at 1549,486 h30
  text "PD1" at 304,391 h30
  text "PD0" at 394,391 h30
  text "PC4" at 1454,386 h30
  text "PC5" at 1549,386 h30
  text "PD3" at 309,286 h30
  text "PD2" at 399,286 h30
  text "PC2" at 1454,286 h30
  text "PC3" at 1549,286 h30
  text "PD5" at 309,186 h30
  text "PD4" at 399,186 h30
  text "PC0" at 1449,186 h30
  text "PC1" at 1544,186 h30
  text "PD7" at 309,86 h30
  text "PD6" at 399,86 h30
  text "PG0" at 1449,86 h30
  text "PG1" at 1544,86 h30